# Altium PCB VESC.PcbDoc (part 2 of 3)
Units mm, origin at the board's own origin, x right, y up, seen from the top; angles counter-clockwise.
Board outline 74.1 x 118 mm, 2 copper layers (Component Side, Bottom Layer), stack 1.571 mm thick; 186 components, 177 nets, 891 pads, 378 vias.
Unrouted connection lines stored in the file: 5.
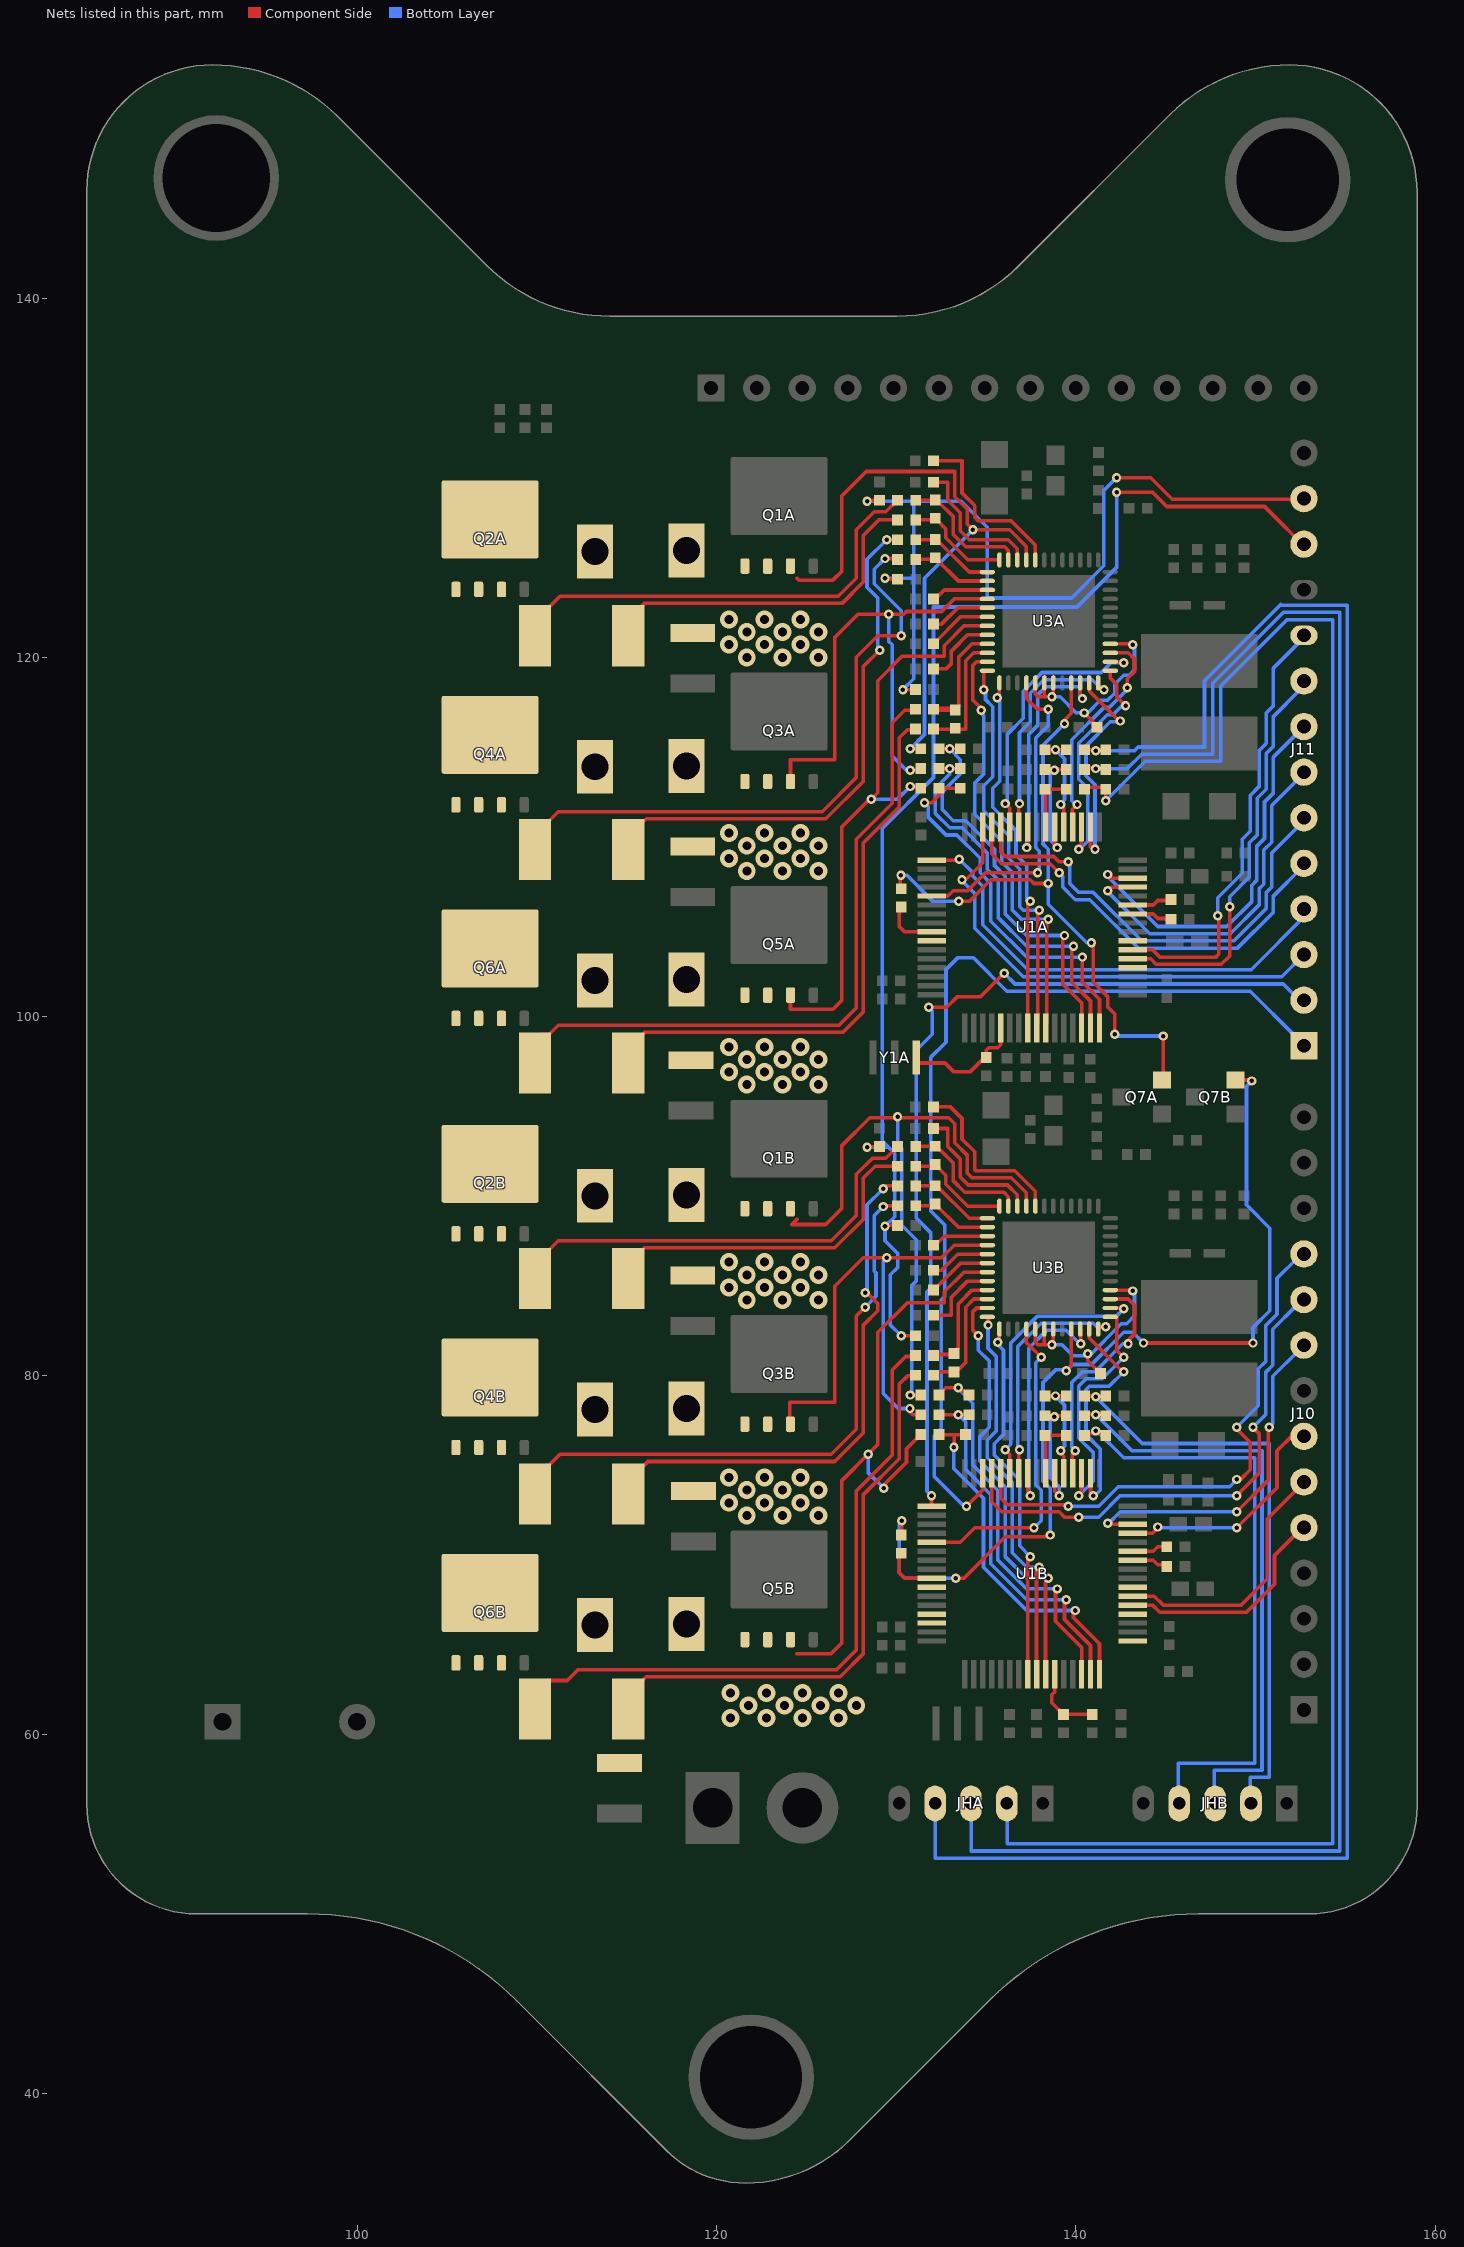
[diagram p2: the nets of this part, all layers, seen from the top]

## Via types
v1: diameter 0.52, hole 0.254, Component Side to Bottom Layer, tented both sides, 205 vias
v2: diameter 1, hole 0.5, Component Side to Bottom Layer, tented both sides, 170 vias
v3: diameter 0.9, hole 0.5, Component Side to Bottom Layer, tented both sides, 3 vias

## Nets (pads, with @x,y where several pads share a name; then routed paths per layer and width w, separated by ;. In a path a pad name is that pad's centre, name@x,y a point inside that pad or via, vN(x,y) a via of type N, cw(c..) or ccw(c..) an arc to the next point about the centre after c; other vN are vias at no path point) (continued)
MA_CURRENT_A: U1A.8 U3A.25 | length 20.3
  Component Side w0.2: v1(135.61,117.75) 135.735,117.875 U3A.25@135.735,118.575 ; U1A.8@137.302,99.55 137.302,106.242 v1(137.46,106.4)
  Bottom Layer w0.2: v1(135.61,117.75) 135.76,117.6 135.76,113.1 135.36,112.7 135.36,111.65 136.66,110.35 136.66,109 137.26,108.4 137.26,106.5 137.36,106.4 v1(137.46,106.4)
MA_CURRENT_B: U1A.9 U3A.24 | length 22.3
  Component Side w0.2: v1(134.86,118.2) 134.86,119.15 134.76,119.25 U3A.24@135.06,119.25 ; U1A.9@137.802,99.55 137.86,99.608 137.86,105.8 v1(137.96,105.9)
  Bottom Layer w0.2: v1(134.86,118.2) 134.96,118.1 134.96,117.65 135.36,117.25 135.36,113.35 134.86,112.85 134.86,111.45 136.26,110.05 136.26,108.8 136.86,108.2 136.86,106.1 137.06,105.9 v1(137.96,105.9)
MA_CURRENT_C: U1A.10 U3A.23 | length 23.9
  Component Side w0.2: v1(134.718,117.05) 134.718,117.15 134.26,117.608 134.26,119.55 134.46,119.75 U3A.23@135.06,119.75 ; U1A.10@138.302,99.55 138.36,99.608 138.36,105.3 v1(138.46,105.4)
  Bottom Layer w0.2: v1(134.718,117.05) 134.718,116.892 134.86,116.75 134.86,113.5 134.36,113 134.36,111.25 135.86,109.75 135.86,108.6 136.46,108 136.46,105.9 136.96,105.4 v1@138.36,105.4
MA_DVDD: C23A.2 U3A.29 U3A.30 U3A.31 U3A.40 | length 13.6
  Component Side w0.2: U3A.29@137.735,118.575 137.735,117.95 137.885,117.8 138.235,117.8 ; U3A.30@138.235,118.575 138.235,117.8 ; U3A.31@138.735,118.575 138.735,117.725 v1(138.66,117.8) 138.235,117.8 ; v1(140.46,116.9) 140.96,116.4 140.96,116.208 C23A.2@141.168,116 ; U3A.40@141.91,120.75 v1@143.235,120.75
  Bottom Layer w0.2: v1(138.66,117.8) 139.118,117.8 140.018,116.9 v1(140.46,116.9) 140.66,116.9 141.36,117.6 141.76,117.6 142.16,118 142.16,118.5 142.66,119 142.96,119 143.26,119.3 143.26,120.6 v1(143.16,120.7)
MA_EN_GATE: R39A.2 U1A.57 | length 3.1
  Component Side w0.2: R39A.2@130.16,106.192 130.16,105 130.46,104.7 U1A.57@131.96,104.7
MA_EN_GATE_R: Q7A.2 R39A.1 U3A.33 | length 38.1
  Component Side w0.2: R39A.1@130.21,107.318 v1@130.21,108.01 ; v1(133.46,106.4) 134.06,106.4 135.26,107.6 137.46,107.6 137.66,107.4 v1(138.46,107.4) ; v1(139.36,116.3) 139.36,116.5 139.735,116.875 U3A.33@139.735,118.575 ; v1(140.86,104.1) 140.96,104 140.96,101.9 141.76,101.1 141.76,100.54 142.15,100.15 v1(142.15,99) ; v1(144.86,98.9) 144.86,96.575 Q7A.2@145.085,96.35
  Bottom Layer w0.2: v1(130.25,107.85) 130.587,107.85 132.037,106.4 v1(133.46,106.4) ; v1(139.36,116.3) 138.16,115.1 138.16,109.6 138.46,109.3 v1(138.46,107.4) 138.46,106.24 140.6,104.1 v1(140.86,104.1) ; v1(142.15,99) 142.15,98.9 143.16,98.9 ; 143.66,98.9 143.16,98.9 ; v1(144.86,98.9) 143.16,98.9
MA_ESTOP: J11.13 R7A.1 R8A.1 R9A.1 | length 48.4
  Component Side w0.2: v1@128.46,128.7 128.502,128.742 R7A.1@129.052,128.742 ; v1(129.36,124.4) 129.41,124.35 R8A.1@130.052,124.35 ; v1(130.36,118.2) R9A.1@131.052,118.2 ; v1(142.26,130) 144.16,130 145.36,128.8 J11.13@152.105,128.8
  Bottom Layer w0.2: v1(128.36,128.7) 130.96,128.7 ; v1(129.36,124.4) 130.96,124.4 ; v1(130.36,118.2) 130.96,118.8 130.96,124.4 ; v1(142.26,130) 141.553,129.293 141.553,125.093 139.76,123.3 135.06,123.3 135.06,127.24 133.6,128.7 130.96,128.7 ; 130.96,124.4 130.96,128.7
MA_H1: U1A.41 U3A.34 | length 14.2
  Component Side w0.2: v1(137.26,109.4) 137.294,109.4 137.302,109.392 137.302,110.542 U1A.41@137.31,110.55 ; U3A.34@140.235,118.575 140.235,117.625 140.26,117.6 v1(140.36,117.7)
  Bottom Layer w0.2: v1(137.26,109.4) 137.26,111.2 137.36,111.3 137.36,115.7 137.86,116.2 137.86,117.9 138.31,118.35 140.21,118.35 v1@140.21,117.75
MA_H2: U1A.42 U3A.36 | length 13.1
  Component Side w0.2: v1@136.744,111.95 136.844,111.85 v1(136.852,111.85) ; U1A.42@136.802,110.75 v1@136.802,111.892 ; U3A.36@141.235,118.575 141.235,118.425 141.46,118.2 v1(141.56,118.2)
  Bottom Layer w0.2: v1@136.76,111.95 136.76,111.85 v1(136.852,111.85) 136.852,115.792 137.46,116.4 137.46,118 138.21,118.75 140.91,118.75 141.46,118.2 v1(141.56,118.2)
MA_H3: U1A.43 U3A.38 | length 15.2
  Component Side w0.2: v1(136.052,111.85) 136.052,111.858 136.302,111.608 U1A.43@136.302,110.75 ; U3A.38@141.91,119.75 142.735,119.75 142.76,119.725 142.66,119.625 v1(142.66,119.7)
  Bottom Layer w0.2: v1(136.052,111.85) 136.16,111.958 136.16,115.7 137.06,116.6 137.06,118.1 138.11,119.15 141.4,119.15 141.95,119.7 v1(142.66,119.7)
MA_HALL1_IN: JHA.2 R15A.1 R18A.1 | length 116.5
  Component Side w0.2: R18A.1@140.468,114.85 R15A.1@141.552,114.85
  Bottom Layer w0.2: 132.16,56.2 132.16,53.1 155.1,53.1 155.1,122.9 151.4,122.9 151.4,122.94 147.16,118.7 147.16,115 143.46,115 143.26,114.8 141.093,114.8 v1(141.1,114.8)
MA_HALL2_IN: JHA.3 R14A.1 R17A.1 | length 112.8
  Component Side w0.2: R17A.1@140.368,113.85 R14A.1@141.452,113.85
  Bottom Layer w0.2: JHA.3@134.16,56.2 134.16,53.5 154.7,53.5 154.7,122.5 151.56,122.5 147.61,118.55 147.61,114.6 143.66,114.6 142.86,113.8 v1(141.1,113.8)
MA_HALL3_IN: JHA.4 R13A.1 R16A.1 | length 109.6
  Component Side w0.2: R16A.1@140.368,112.75 R13A.1@141.452,112.75 ; v1@141.652,112.008 R13A.1@141.652,112.65
  Bottom Layer w0.2: 136.16,56.2 136.16,53.9 154.3,53.9 154.3,122.1 151.76,122.1 148.06,118.4 148.06,114.2 143.86,114.2 v1(141.66,112)
MA_HALL_1: C14A.2 R18A.2 U1A.37 | length 5.9
  Component Side w0.2: C14A.2@138.268,114.85 v1(138.86,114.85) R18A.2@139.452,114.85 ; v1(139.16,111.8) 139.31,111.65 U1A.37@139.31,110.55
  Bottom Layer w0.2: v1(138.86,114.85) 139.36,114.35 139.36,112.058 139.102,111.8 v1(139.16,111.8)
MA_HALL_2: C13A.2 R17A.2 U1A.38 | length 7.3
  Component Side w0.2: C13A.2@138.268,113.75 R17A.2@139.452,113.75 ; U1A.38@138.802,110.75 138.802,109.558 v1(138.96,109.4)
  Bottom Layer w0.2: v1@138.868,113.85 138.8,113.782 v1(138.8,113.7) 138.8,113.682 138.56,113.442 138.56,109.8 v1(138.96,109.4)
MA_HALL_3: C12A.2 R16A.2 U1A.39 | length 3.3
  Component Side w0.2: C12A.2@138.268,112.65 C12A.2@138.31,112.65 ; U1A.39@138.31,110.55 C12A.2@138.31,112.65 ; R16A.2@139.452,112.65 C12A.2@138.31,112.65
MA_L1: U1A.34 U3A.35 | length 12.4
  Component Side w0.2: U3A.35@140.735,118.575 140.735,118.125 142.41,116.45 v1(142.46,116.45) ; U1A.34@140.86,110.2 140.81,110.15 140.81,109.45 140.96,109.3 v1(141.06,109.3)
  Bottom Layer w0.2: v1(141.06,109.3) 141.06,112.9 140.56,113.4 140.56,115.06 141.9,116.4 142.41,116.4 v1(142.46,116.45)
MA_L2: U1A.35 U3A.37 | length 13.8
  Component Side w0.2: v1(140.16,109.3) 140.21,109.3 140.26,109.25 140.31,109.3 140.302,109.308 U1A.35@140.302,110.75 ; U3A.37@141.91,119.25 141.91,118.85 142.26,118.5 142.26,117.8 v1(142.76,117.3)
  Bottom Layer w0.2: v1(140.16,109.3) 140.21,109.3 140.66,109.75 140.66,112.7 140.16,113.2 140.16,115.21 141.75,116.8 142.06,116.8 142.66,117.4 v1(142.76,117.3)
MA_L3: U1A.36 U3A.39 | length 12.9
  Component Side w0.2: U1A.36@139.802,110.45 139.802,111.542 v1(140.06,111.8) ; U3A.39@141.91,120.25 142.91,120.25 143.26,119.9 143.26,119.2 142.86,118.8 v1(142.86,118.3)
  Bottom Layer w0.2: v1(140.06,111.8) 139.96,111.8 139.76,112 139.76,115.4 141.56,117.2 141.86,117.2 142.86,118.2 v1(142.86,118.3)
MA_LED_GREEN: R32A.2 U1A.26 | length 2
  Component Side w0.2: U1A.26@143.16,105.7 144.31,105.7 144.56,105.45 144.952,105.45 R32A.2@145.052,105.35
MA_LED_RED: R31A.2 U1A.27 | length 2
  Component Side w0.2: U1A.27@143.16,106.2 144.31,106.2 144.56,106.45 R31A.2@145.052,106.45
MA_MISO_ADC_EXT2: J11.10 U1A.22 | length 24.7
  Component Side w0.2: U1A.22@143.16,103.7 144.26,103.7 144.66,103.3 147.8,103.3 147.96,103.46 147.96,105.54 v1(147.9,105.6)
  Bottom Layer w0.2: v1(147.9,105.6) 147.9,106.6 149.26,107.96 149.26,109.86 149.7,110.3 149.7,112.3 150.2,112.8 150.2,114.8 150.6,115.2 150.6,116.9 151,117.3 151,119.4 152.4,120.8 J11.10@152.8,120.8
MA_MOSI: U1A.23
MA_NFAULT: U1A.53 U3A.28 | length 18.3
  Component Side w0.2: U1A.53@131.96,106.7 132.86,106.7 133.16,107 133.96,107 134.96,108 v1(137.86,108) ; U3A.28@137.235,118.575 137.235,117.725 137.86,117.1 v1(138.46,117.1)
  Bottom Layer w0.2: v1(137.86,108) 137.96,108 137.96,109.2 137.76,109.4 137.76,115.5 138.46,116.2 v1(138.46,117.1)
MA_PA_AGND: C35A.1 R10A.1 R26A.2 | length 18.9
  Component Side w0.2: R10A.1@115.36,122.1 115.36,122.4 115.96,123 126.96,123 128.16,124.2 128.16,126.8 129.01,127.65 R26A.2@129.802,127.65 ; 129.552,127.65 R26A.2@129.802,127.65 ; R26A.2@130.052,127.65 R26A.2@129.802,127.65
  other v2: 121.66,120 123.66,120 125.66,120 120.66,120.7 122.66,120.7 124.66,120.7 121.66,121.4 123.66,121.4 125.66,121.4 120.66,122.1 122.66,122.1 124.66,122.1
MA_PA_AGND_F: C15A.1 R26A.1 U3A.12 | length 6
  Component Side w0.2: R26A.1@131.168,127.75 R26A.1@131.068,127.65 C15A.1@132.052,127.65 ; C15A.1@132.16,127.742 132.752,127.15 132.752,126.65 133.977,125.425 U3A.12@135.735,125.425
MA_PA_HI: R1A.1 U3A.8 | length 9.9
  Component Side w0.2: R1A.1@132.06,130.95 133.652,130.95 133.652,129.15 134.352,128.45 134.352,127.8 134.544,127.608 136.377,127.608 137.735,126.25 U3A.8@137.735,125.425
MA_PA_LO: R2A.1 U3A.10 | length 8
  Component Side w0.2: R2A.1@132.06,129.75 132.852,129.75 132.852,128.75 133.552,128.05 133.552,127.05 134.052,126.55 136.235,126.55 136.735,126.05 U3A.10@136.735,125.425
MA_PA_SOURCE: Q2A.1 Q2A.2 Q2A.3 R10A.2 R25A.2 | length 25.9
  Component Side w0.2: R10A.2@109.86,121.1 109.86,122.7 110.56,122.7 111.26,123.4 126.76,123.4 127.76,124.4 127.76,127.1 128.76,128.1 129.402,128.1 R25A.2@130.052,128.75
MA_PA_SOURCE_F: C15A.2 R25A.1 U3A.11 | length 8.6
  Component Side w0.2: U3A.11@136.235,125.425 136.235,125.95 136.035,126.15 133.852,126.15 133.152,126.85 133.152,127.85 C15A.2@132.252,128.75 ; C15A.2@132.252,128.75 R25A.1@131.068,128.75 C15A.2@132.252,128.75
MA_PB_AGND: C36A.1 R11A.1 R28A.2 | length 28.6
  Component Side w0.2: R11A.1@115.76,110.7 116.06,111 126.06,111 128.16,113.1 128.16,119.5 v1(129.06,120.4) ; v1(129.452,126.55) R28A.2@130.052,126.55
  Bottom Layer w0.2: v1(129.06,120.4) 128.96,120.5 128.96,123.3 128.36,123.9 128.36,125.458 v1(129.452,126.55)
  other v2: 121.66,108.1 123.66,108.1 125.66,108.1 120.66,108.8 122.66,108.8 124.66,108.8 121.66,109.5 123.66,109.5 125.66,109.5 120.66,110.2 122.66,110.2 124.66,110.2
MA_PB_AGND_F: C16A.1 R28A.1 U3A.13 | length 4.7
  Component Side w0.2: R28A.1@131.068,126.55 132.252,126.55 134.052,124.75 U3A.13@135.06,124.75
MA_PB_HI: R3A.1 U3A.17 | length 3.4
  Component Side w0.2: R3A.1@132.068,121.85 132.51,121.85 133.41,122.75 U3A.17@135.06,122.75
MA_PB_LO: R4A.1 U3A.15 | length 3.4
  Component Side w0.2: R4A.1@132.168,123.25 132.668,123.75 U3A.15@135.41,123.75
MA_PB_SOURCE: Q4A.1 Q4A.2 Q4A.3 R11A.2 R27A.2 | length 36
  Component Side w0.2: R11A.2@109.86,109.3 109.86,110.7 110.06,110.9 110.66,110.9 111.16,111.4 125.86,111.4 127.76,113.3 127.76,120 127.96,120.2 128.96,121.2 v1(130.26,121.2) ; v1(129.36,125.5) 130.052,125.5 R27A.2@130.052,125.45
  Bottom Layer w0.2: v1(129.36,125.5) 128.76,124.9 128.76,124.1 130.26,122.6 v1(130.26,121.2)
MA_PB_SOURCE_F: C16A.2 R27A.1 U3A.14 | length 4.4
  Component Side w0.2: R27A.1@131.16,125.45 132.252,125.45 133.452,124.25 U3A.14@135.06,124.25
MA_PC_AGND: C37A.1 R12A.1 R30A.2 | length 30.1
  Component Side w0.2: R12A.1@115.76,98.9 115.96,99.1 127,99.1 128.16,100.26 128.16,109.66 130.16,111.66 130.16,115.516 130.61,115.966 R30A.2@131.052,115.966
  other v2: 121.66,96.2 123.66,96.2 125.66,96.2 120.66,96.9 122.66,96.9 124.66,96.9 121.66,97.6 123.66,97.6 125.66,97.6 120.66,98.3 122.66,98.3 124.66,98.3
MA_PC_AGND_F: C17A.1 R30A.1 U3A.22 | length 7
  Component Side w0.2: R30A.1@132.068,116 133.86,116 133.86,118.15 133.86,119.8 134.31,120.25 U3A.22@135.06,120.25
MA_PC_HI: R5A.1 U3A.18 | length 3.6
  Component Side w0.2: R5A.1@132.068,120.75 133.568,122.25 U3A.18@135.06,122.25
MA_PC_LO: R6A.1 U3A.20 | length 4.2
  Component Side w0.2: R6A.1@132.068,119.35 132.76,119.35 133.06,119.65 133.06,120.35 133.96,121.25 U3A.20@135.06,121.25
MA_PC_SOURCE: Q6A.1 Q6A.2 Q6A.3 R12A.2 R29A.2 | length 38.2
  Component Side w0.2: R12A.2@109.86,97.4 109.86,98.7 110.16,99 110.66,99 111.16,99.5 126.8,99.5 127.76,100.46 127.76,109.86 129.76,111.86 129.76,116.358 130.452,117.05 R29A.2@131.06,117.05
MA_PC_SOURCE_F: C17A.2 R29A.1 U3A.21 | length 7
  Component Side w0.2: R29A.1@132.168,117.05 C17A.2@133.268,117.05 ; R29A.1@132.26,117.158 133.368,117.158 133.46,117.25 133.46,120 134.21,120.75 U3A.21@135.06,120.75
MA_PHASE_A: JAA.1 Q1A.1 Q1A.2 Q1A.3 Q2A.5 Q2A.6 Q2A.7 Q2A.8 Q2A.9@107.36,127.68 R23A.2 U3A.9 | length 36
  Component Side w0.2: 124.46,124.4 124.56,124.3 126.46,124.3 126.96,124.8 126.96,129 128.31,130.35 133.252,130.35 133.252,128.95 133.952,128.25 133.952,127.408 v1(134.26,127.1) 136.302,127.1 137.235,126.167 U3A.9@137.235,125.425 ; v1@130.602,114.9 v1(130.76,114.9) R23A.2@131.352,114.9
  Bottom Layer w0.2: v1(130.76,114.9) 131.56,115.7 131.56,124.4 v1(134.26,127.1)
MA_PHASE_B: JBA.1 Q3A.1 Q3A.2 Q3A.3 Q4A.5 Q4A.6 Q4A.7 Q4A.8 Q4A.9@107.36,115.68 R21A.2 U3A.16 | length 30.4
  Component Side w0.2: Q3A.3@124.095,112.88 124.095,114.3 126.56,114.3 126.56,121.1 127.86,122.4 v1(129.56,122.4) 130.41,122.4 130.56,122.55 132.51,122.55 133.21,123.25 U3A.16@135.41,123.25 ; v1(130.76,113.7) 131.252,113.7 R21A.2@131.352,113.8
  Bottom Layer w0.2: v1(129.56,122.4) 129.56,120.9 129.76,120.7 129.76,114.5 130.56,113.7 v1(130.76,113.7)
MA_PHASE_C: JCA.1 Q5A.1 Q5A.2 Q5A.3 Q6A.5 Q6A.6 Q6A.7 Q6A.8 Q6A.9@107.36,103.78 R19A.2 U3A.19 | length 33.4
  Component Side w0.2: Q5A.3@124.095,101.18 124.095,100.4 126.46,100.4 126.96,100.9 126.96,110.56 128.55,112.15 v1(128.6,112.1) 128.96,112.46 128.96,118.7 130.31,120.05 132.66,120.05 132.66,120.65 133.76,121.75 U3A.19@135.06,121.75 ; v1(130.76,112.8) 131.252,112.8 R19A.2@131.352,112.7
  Bottom Layer w0.2: v1(128.6,112.1) 130.06,112.1 v1(130.76,112.8)
MA_RX: J11.8 U1A.30 | length 22.5
  Component Side w0.2: v1@141.76,108 141.76,107.8 141.86,107.7 U1A.30@143.16,107.7
  Bottom Layer w0.2: v1(141.76,107.9) 141.76,107.8 144.56,105 148.4,105 149.8,106.4 149.8,107.3 150.06,107.56 150.06,109.46 150.5,109.9 150.5,111.94 151,112.44 151,114.44 J11.8@152.7,116.14
MA_RX_SDA_NSS: U1A.20
MA_SCK_ADC_EXT: J11.9 U1A.21 | length 22.4
  Component Side w0.2: U1A.21@143.16,103.2 144.16,103.2 144.46,102.9 148.1,102.9 148.56,103.36 v1@148.56,106
  Bottom Layer w0.2: v1(148.56,106.1) 148.56,106.66 149.66,107.76 149.66,109.66 150.1,110.1 150.1,112.14 150.6,112.64 150.6,114.64 151,115.04 151,116.7 152.5,118.2 J11.9@152.5,118.5
MA_SERVO: U1A.58
MA_SWDCLK: J11.4 U1A.49 | length 26.7
  Component Side w0.2: U1A.49@131.96,108.7 133.45,108.7 v1(133.5,108.75)
  Bottom Layer w0.2: v1(133.5,108.75) 134.26,107.99 134.26,107.8 134.81,107.25 134.81,105.1 137.31,102.6 149.76,102.6 152.9,105.74 J11.4@152.9,106.3
MA_SWDIO: J11.3 U1A.46 | length 26.4
  Component Side w0.2: v1(133.65,107.6) 133.86,107.6 134.81,108.55 U1A.46@134.81,110.55
  Bottom Layer w0.2: v1@133.73,107.47 134.36,106.84 134.36,104.9 137.06,102.2 151.46,102.2 J11.3@152.7,103.44
MA_TX: J11.7 U1A.29 | length 20
  Component Side w0.2: v1(141.76,107) 141.96,107.2 U1A.29@143.16,107.2
  Bottom Layer w0.2: v1(141.76,107) 141.76,106.95 144.11,104.6 148.6,104.6 150.2,106.2 150.2,107.1 150.46,107.36 150.46,109.26 150.9,109.7 150.9,111.74 J11.7@152.73,113.57
MA_USB_DM: J11.6 U1A.44 | length 25.6
  Component Side w0.2: U1A.44@135.81,110.55 135.81,109.15 136.06,108.9 138.76,108.9 139.06,108.6 v1(139.56,108.6)
  Bottom Layer w0.2: v1(139.56,108.6) 139.66,108.5 139.66,107.4 140.16,106.9 140.96,106.9 143.66,104.2 148.8,104.2 150.6,106 150.6,106.9 150.9,107.2 150.9,109.1 152.7,110.9 J11.6@152.7,111.06
MA_USB_DP: J11.5 U1A.45 | length 23.9
  Component Side w0.2: U1A.45@135.31,110.55 135.31,109.05 135.86,108.5 138.56,108.5 v1(139.06,108)
  Bottom Layer w0.2: v1(139.06,108) 139.26,107.8 139.26,107.2 139.96,106.5 140.76,106.5 143.46,103.8 149,103.8 151,105.8 151,106.7 152.6,108.3 J11.5@152.8,108.3
MA_VOLTAGE_A: R23A.1 R24A.2 U1A.14 | length 22.3
  Component Side w0.2: R23A.1@132.318,114.866 132.352,114.9 v1(132.96,114.9) 133.518,114.9 133.552,114.866 R24A.2@133.552,114.9 ; v1(139.36,104.5) 139.26,104.4 139.26,101.8 140.31,100.75 U1A.14@140.31,99.45
  Bottom Layer w0.2: v1(132.96,114.9) 133.56,114.3 133.56,113.5 132.56,112.5 132.56,111.5 133.16,110.9 133.86,110.9 135.46,109.3 135.46,108.4 136.06,107.8 136.06,105.7 137.26,104.5 v1(139.36,104.5)
MA_VOLTAGE_B: R21A.1 R22A.2 U1A.15 | length 21.6
  Component Side w0.2: R21A.1@132.318,113.766 132.352,113.8 R21A.1@132.368,113.8 v1(132.96,113.8) 133.518,113.8 133.552,113.766 R22A.2@133.552,113.8 ; v1(139.86,103.9) 139.76,103.8 139.76,101.9 140.81,100.85 U1A.15@140.81,99.45
  Bottom Layer w0.2: v1(132.96,113.8) 132.96,113.5 132.16,112.7 132.16,111.3 132.96,110.5 133.66,110.5 135.06,109.1 135.06,108.2 135.66,107.6 135.66,105.5 137.26,103.9 v1(139.86,103.9)
MA_VOLTAGE_C: R19A.1 R20A.2 U1A.16 | length 21.3
  Component Side w0.2: v1(131.56,111.9) 131.96,111.9 132.368,112.308 R19A.1@132.368,112.7 133.518,112.7 133.552,112.666 R20A.2@133.552,112.7 ; R19A.1@132.318,112.666 132.352,112.7 R19A.1@132.36,112.692 ; v1(140.36,103.3) 140.36,101.9 141.31,100.95 U1A.16@141.31,99.45
  Bottom Layer w0.2: v1(131.56,111.9) 131.76,111.7 131.76,111.1 132.76,110.1 133.36,110.1 134.66,108.8 134.66,108 135.26,107.4 135.26,105.3 137.26,103.3 v1(140.36,103.3)
MB_ADC_TEMP: U1B.17
MB_AN_IN: R38B.1 R40B.2 U1B.11 | length 4.2
  Component Side w0.2: U1B.11@138.81,63.35 138.81,62.36 138.65,62.2 138.65,61.758 R40B.2@139.3,61.108 R38B.1@140.9,61.108
MB_CAN_RX: U1B.61
MB_CAN_TX: U1B.62
MB_CURRENT_A: U1B.8 U3B.25 | length 20.6
  Component Side w0.2: v1(135.65,81.85) 135.65,81.84 135.71,81.9 135.735,81.875 U3B.25@135.735,82.575 ; U1B.8@137.31,63.35 137.31,69.75 v1(137.46,69.9)
  Bottom Layer w0.2: v1(135.65,81.85) 135.65,81.81 135.6,81.76 135.96,81.4 135.96,76.7 135.45,76.19 135.45,75.56 136.86,74.15 136.86,70.5 v1(137.46,69.9)
MB_CURRENT_B: U1B.9 U3B.24 | length 21.8
  Component Side w0.2: v1(135.1,82.8) 135.1,83.2 U3B.24@135.26,83.2 ; U1B.9@137.802,63.55 137.802,69.142 v1(137.96,69.3)
  Bottom Layer w0.2: v1(135.1,82.8) 135.1,81.51 135.56,81.05 135.56,76.9 135.05,76.39 135.05,75.41 136.46,74 136.45,74 136.45,70.11 137.26,69.3 v1@137.86,69.3
MB_CURRENT_C: U1B.10 U3B.23 | length 23.9
  Component Side w0.2: v1(134.56,82.2) 134.26,82.5 134.26,83.55 134.46,83.75 U3B.23@135.06,83.75 ; U1B.10@138.302,63.55 138.302,68.442 138.385,68.525 138.385,68.775 v1(138.46,68.7)
  Bottom Layer w0.2: v1(134.56,82.2) 134.56,81.4 135.16,80.8 135.16,77.1 134.65,76.59 134.65,75.21 136.06,73.8 136.05,73.8 136.05,69.91 137.26,68.7 v1@138.36,68.7
MB_DVDD: C23B.2 U3B.29 U3B.30 U3B.31 U3B.40 | length 13.4
  Component Side w0.2: U3B.29@137.735,82.575 137.735,81.85 137.873,81.712 138.235,81.712 ; U3B.30@138.235,82.575 138.235,81.712 ; v1@138.548,81.6 138.648,81.7 v1(138.66,81.7) ; v1@138.548,81.712 138.235,81.712 ; v1@138.735,81.787 U3B.31@138.735,82.575 ; v1(140.66,81.2) 140.66,80.808 C23B.2@141.368,80.1 ; U3B.40@141.91,84.75 v1@143.235,84.75
  Bottom Layer w0.2: v1(138.66,81.7) 139.218,81.7 139.818,81.1 140.56,81.1 v1(140.66,81.2) 140.76,81.1 142.53,82.87 142.82,82.87 143.26,83.31 143.26,83.6 143.26,84.6 v1(143.16,84.7)
MB_EN_GATE: R39B.2 U1B.57 | length 3.1
  Component Side w0.2: R39B.2@130.26,70.092 130.16,69.992 130.16,69 130.46,68.7 U1B.57@131.96,68.7
MB_EN_GATE_R: Q7B.2 R39B.1 U3B.33 | length 54
  Component Side w0.2: v1(130.3,71.9) 130.3,71.268 R39B.1@130.36,71.208 ; v1(133.3,68.7) 133.76,68.7 136.06,71 138.46,71 v1(138.56,71.1) ; v1(139.46,80.25) 139.735,80.525 U3B.33@139.735,82.575 ; v1(143.76,81.8) v1(149.86,81.8) ; Q7B.2@148.885,96.45 v1@149.75,96.45
  Bottom Layer w0.2: v1(130.3,71.9) 130.16,71.76 130.16,69 130.46,68.7 v1(133.3,68.7) ; v1(138.56,71.1) 138.56,73.7 138.16,74.1 138.16,79.6 138.86,80.3 v1@139.51,80.3 ; v1(139.46,80.25) v1@139.51,80.3 ; v1(143.76,81.8) 143.16,82.4 142.66,82.4 140.86,80.6 139.81,80.6 v1@139.51,80.3 ; v1(149.8,96.4) 149.5,96.1 149.5,89.5 150.8,88.2 150.8,83.6 149.86,82.66 v1(149.86,81.8)
MB_ESTOP: J11.12 R7B.1 R8B.1 R9B.1 | length 73.6
  Component Side w0.2: v1@128.502,92.742 R7B.1@129.052,92.742 ; v1@129.41,88.35 R8B.1@130.052,88.35 ; v1(130.26,82.2) R9B.1@131.052,82.2 ; v1(142.26,129.2) 144.26,129.2 145.06,128.4 150.5,128.4 J11.12@153.025,125.875
  Bottom Layer w0.2: v1(128.36,92.7) 129.56,92.7 ; v1(130.26,82.2) 129.66,82.8 129.66,85.6 130.06,86 130.06,86.8 129.36,87.5 v1(129.36,88.3) 129.9,88.84 129.9,92.36 129.2,93.06 129.2,110.44 132.06,113.3 132.06,122.8 140.06,122.8 142.26,125 v1(142.26,129.2)
MB_H1: U1B.41 U3B.34 | length 14.1
  Component Side w0.2: U1B.41@137.31,74.55 137.302,74.542 137.302,73.608 137.56,73.35 137.51,73.3 v1(137.46,73.3) ; U3B.34@140.235,82.575 140.26,82.55 v1(140.26,81.75)
  Bottom Layer w0.2: v1(137.46,73.3) 137.36,73.4 137.36,81.5 138.36,82.5 139.46,82.5 v1@140.21,81.75
MB_H2: U1B.42 U3B.36 | length 13.3
  Component Side w0.2: v1@136.744,75.95 136.844,75.85 v1(136.852,75.85) ; U1B.42@136.802,74.75 v1@136.802,75.892 ; U3B.36@141.235,82.575 141.36,82.7 v1(141.66,82.7)
  Bottom Layer w0.2: v1@136.76,75.95 136.852,75.858 v1(136.852,75.85) 136.76,75.85 136.76,81.6 138.06,82.9 140.96,82.9 141.16,82.7 v1(141.66,82.7)
MB_H3: U1B.43 U3B.38 | length 15.2
  Component Side w0.2: v1(136.052,75.85) 136.052,75.858 136.302,75.608 U1B.43@136.302,74.75 ; U3B.38@141.91,83.75 v1@142.735,83.75
  Bottom Layer w0.2: v1(136.052,75.85) 136.36,76.158 136.36,81.8 137.86,83.3 142.26,83.3 v1(142.66,83.7)
MB_HALL1_IN: JHB.2 R15B.1 R18B.1 | length 33.4
  Component Side w0.2: R18B.1@140.468,78.85 R15B.1@141.552,78.85
  Bottom Layer w0.2: v1(141.1,78.8) 141.1,78.793 143.693,76.2 150.76,76.2 150.76,57.6 149.7,57.6 149.7,55.94 JHB.2@149.5,55.74
MB_HALL2_IN: JHB.3 R14B.1 R17B.1 | length 34
  Component Side w0.2: R17B.1@140.368,77.85 R14B.1@141.452,77.85
  Bottom Layer w0.2: v1(141.1,77.8) 141.118,77.8 143.118,75.8 150.36,75.8 150.36,58 147.7,58 147.7,55.94 JHB.3@147.5,55.74
MB_HALL3_IN: JHB.4 R13B.1 R16B.1 | length 34.6
  Component Side w0.2: R16B.1@140.368,76.75 R13B.1@141.452,76.75
  Bottom Layer w0.2: v1(141.1,76.9) 141.1,76.94 141.11,76.95 142.66,75.4 149.96,75.4 149.96,58.4 145.7,58.4 145.7,55.94 JHB.4@145.5,55.74
MB_HALL_1: C14B.2 R18B.2 U1B.37 | length 6.1
  Component Side w0.2: C14B.2@138.268,78.85 v1(138.86,78.85) R18B.2@139.452,78.85 ; v1(139.16,75.8) 139.01,75.8 139.31,75.5 U1B.37@139.31,74.55
  Bottom Layer w0.2: v1(138.86,78.85) 139.36,78.35 139.36,76.042 139.118,75.8 v1(139.16,75.8)
MB_HALL_2: C13B.2 R17B.2 U1B.38 | length 7.8
  Component Side w0.2: C13B.2@138.268,77.75 R17B.2@139.452,77.75 ; U1B.38@138.802,74.55 U1B.38@138.802,74.75 ; U1B.38@138.81,74.55 138.81,73.55 v1(139.06,73.3)
  Bottom Layer w0.2: v1@138.868,77.85 138.8,77.782 v1(138.8,77.7) 138.8,77.682 138.56,77.442 138.56,74.3 139.06,73.8 139.06,73.4 138.96,73.3 v1(139.06,73.3)
MB_HALL_3: C12B.2 R16B.2 U1B.39 | length 3.3
  Component Side w0.2: C12B.2@138.268,76.65 R16B.2@139.452,76.65 ; U1B.39@138.31,74.55 C12B.2@138.31,76.708
MB_L1: U1B.34 U3B.35 | length 13.3
  Component Side w0.2: U3B.35@140.735,82.575 140.735,82.075 v1@142.61,80.2 ; v1@140.81,73.45 U1B.34@140.81,74.55
  Bottom Layer w0.2: v1@140.86,73.4 141.16,73.4 141.36,73.6 141.36,75.9 140.56,76.7 140.56,79.2 140.76,79.4 141.86,79.4 v1(142.66,80.2)
  other v1: 140.96,73.3
MB_L2: U1B.35 U3B.37 | length 14.6
  Component Side w0.2: v1(140.16,73.3) 140.294,73.3 140.302,73.308 U1B.35@140.302,74.75 ; v1(142.66,81) 142.26,81.4 U3B.37@142.26,83.25 ; U3B.37@142.26,83.25 U3B.37@141.91,83.25 U3B.37@142.26,83.25
  Bottom Layer w0.2: v1(140.16,73.3) 140.96,74.1 140.96,75.7 140.16,76.5 140.16,79.4 140.56,79.8 141.46,79.8 v1(142.66,81)
MB_L3: U1B.36 U3B.39 | length 13.1
  Component Side w0.2: U1B.36@139.802,74.45 v1@139.802,75.683 ; U3B.39@141.91,84.25 142.91,84.25 143.26,83.9 143.26,82.3 ; v1(142.9,81.75) 142.9,81.94 143.26,82.3 ; 143.26,82.5 143.26,82.3
  Bottom Layer w0.2: v1(139.96,75.8) 139.76,76 139.76,79.6 140.36,80.2 141.06,80.2 142.61,81.75 v1(142.9,81.75)
MB_LED_GREEN: R32B.2 U1B.26 | length 2
  Component Side w0.2: U1B.26@143.16,69.7 144.31,69.7 144.56,69.45 144.952,69.45 R32B.2@145.052,69.35
MB_LED_RED: R31B.2 U1B.27 | length 2
  Component Side w0.2: U1B.27@143.16,70.2 144.31,70.2 144.56,70.45 R31B.2@145.052,70.45
MB_MISO_ADC_EXT2: J10.6 U1B.22 | length 14
  Component Side w0.2: U1B.22@143.16,67.7 144.36,67.7 144.86,67.2 149.2,67.2 150.66,68.66 150.66,72 J10.6@152.355,73.695
MB_MOSI: U1B.23
MB_NFAULT: U1B.53 U3B.28 | length 18
  Component Side w0.2: U1B.53@131.96,70.7 133.56,70.7 134.06,71.2 134.36,71.5 v1(137.66,71.5) ; U3B.28@137.235,82.575 137.235,81.825 v1(138.06,81)
  Bottom Layer w0.2: v1@137.66,71.4 v1(137.66,71.5) 138.06,71.9 138.06,73.6 137.76,73.9 137.76,80.7 v1(138.06,81)
MB_PA_AGND: C35B.1 R10B.1 R26B.2 | length 17.9
  Component Side w0.2: R10B.1@115.56,86.4 115.56,86.7 115.96,87.1 126.56,87.1 128.16,88.7 128.16,91 128.81,91.65 R26B.2@129.802,91.65
  other v2: 121.66,84.2 123.66,84.2 125.66,84.2 120.66,84.9 122.66,84.9 124.66,84.9 121.66,85.6 123.66,85.6 125.66,85.6 120.66,86.3 122.66,86.3 124.66,86.3
MB_PA_AGND_F: C15B.1 R26B.1 U3B.12 | length 6
  Component Side w0.2: R26B.1@131.168,91.75 R26B.1@131.068,91.65 C15B.1@132.052,91.65 ; C15B.1@132.16,91.742 132.752,91.15 132.752,90.65 133.977,89.425 U3B.12@135.735,89.425
MB_PA_HI: R1B.1 U3B.8 | length 9.7
  Component Side w0.2: R1B.1@132.06,94.95 133.01,94.95 133.652,94.308 133.652,93.15 134.352,92.45 134.352,91.45 134.402,91.4 136.585,91.4 137.735,90.25 U3B.8@137.735,89.425
MB_PA_LO: R2B.1 U3B.10 | length 8
  Component Side w0.2: R2B.1@132.06,93.75 132.852,93.75 132.852,92.75 133.552,92.05 133.552,91.05 134.002,90.6 136.185,90.6 136.735,90.05 U3B.10@136.735,89.425
MB_PA_SOURCE: Q2B.1 Q2B.2 Q2B.3 R10B.2 R25B.2 | length 25.6
  Component Side w0.2: R10B.2@109.86,85.1 109.86,86.6 110.26,87 110.66,87 111.16,87.5 126.36,87.5 127.76,88.9 127.76,91.2 128.66,92.1 129.402,92.1 R25B.2@130.052,92.75
MB_PA_SOURCE_F: C15B.2 R25B.1 U3B.11 | length 7.3
  Component Side w0.2: R25B.1@131.068,92.75 132.152,92.75 C15B.2@132.16,92.758 ; C15B.2@132.252,92.75 133.152,91.85 133.152,90.85 133.802,90.2 135.985,90.2 136.235,89.95 U3B.11@136.235,89.425
MB_PB_AGND: C36B.1 R11B.1 R28B.2 | length 28.9
  Component Side w0.2: R11B.1@115.66,74.7 116.16,75.2 126.56,75.2 128.16,76.8 128.16,82.8 128.96,83.6 128.96,84 128.36,84.6 v1(128.26,84.6) ; v1(129.26,90.4) 129.41,90.55 R28B.2@130.052,90.55
  Bottom Layer w0.2: v1(128.26,84.6) 128.36,84.7 128.36,89.5 v1(129.26,90.4)
  other v2: 121.66,72.2 123.66,72.2 125.66,72.2 120.66,72.9 122.66,72.9 124.66,72.9 121.66,73.6 123.66,73.6 125.66,73.6 120.66,74.3 122.66,74.3 124.66,74.3
MB_PB_AGND_F: C16B.1 R28B.1 U3B.13 | length 4.7
  Component Side w0.2: R28B.1@131.068,90.55 132.252,90.55 134.052,88.75 U3B.13@135.06,88.75
MB_PB_HI: R3B.1 U3B.17 | length 3.4
  Component Side w0.2: R3B.1@132.068,85.85 132.51,85.85 133.41,86.75 U3B.17@135.06,86.75
MB_PB_LO: R4B.1 U3B.15 | length 3.4
  Component Side w0.2: R4B.1@132.168,87.25 132.668,87.75 U3B.15@135.41,87.75
MB_PB_SOURCE: Q4B.1 Q4B.2 Q4B.3 R11B.2 R27B.2 | length 34.3
  Component Side w0.2: R11B.2@109.86,73.3 109.86,74.4 110.46,75 110.66,75 111.26,75.6 126.36,75.6 127.76,77 127.76,83.3 v1(128.26,83.8) ; v1(129.26,89.4) 129.31,89.45 R27B.2@130.052,89.45
  Bottom Layer w0.2: v1(128.26,83.8) 128.86,84.4 128.86,85.7 128.76,85.8 128.76,88.9 v1(129.26,89.4) ; v1(129.26,89.4) 129.402,89.4 v1(129.26,89.4)
MB_PB_SOURCE_F: C16B.2 R27B.1 U3B.14 | length 4.4
  Component Side w0.2: R27B.1@131.16,89.45 132.252,89.45 133.452,88.25 U3B.14@135.06,88.25
MB_PC_AGND: C37B.1 R12B.1 R30B.2 | length 31.8
  Component Side w0.2: R12B.1@115.06,61.4 115.06,62.2 116.06,63.2 126.86,63.2 128.16,64.5 128.16,73.36 130.16,75.36 130.16,79.516 130.61,79.966 R30B.2@131.052,79.966
  other v2: 120.76,60.9 122.76,60.9 124.76,60.9 126.76,60.9 121.76,61.6 123.76,61.6 125.76,61.6 127.76,61.6 120.76,62.3 122.76,62.3 124.76,62.3 126.76,62.3
MB_PC_AGND_F: C17B.1 R30B.1 U3B.22 | length 6.8
  Component Side w0.2: R30B.1@132.068,80 132.268,80.2 133.35,80.2 133.86,80.71 133.86,82.15 133.86,83.8 134.31,84.25 U3B.22@135.06,84.25 ; C17B.1@133.2,80 C17B.1@133.2,80.2
MB_PC_HI: R5B.1 U3B.18 | length 3.6
  Component Side w0.2: R5B.1@132.068,84.75 133.568,86.25 U3B.18@135.06,86.25
MB_PC_LO: R6B.1 U3B.20 | length 4.4
  Component Side w0.2: R6B.1@132.068,83.35 133.06,83.35 133.06,84.35 133.96,85.25 U3B.20@135.06,85.25
MB_PC_SOURCE: Q6B.1 Q6B.2 Q6B.3 R12B.2 R29B.2 | length 35.9
  Component Side w0.2: R12B.2@110.56,63 111.66,63 112.26,63.6 126.66,63.6 127.76,64.7 127.76,73.56 129.76,75.56 129.76,80.3 130.51,81.05 R29B.2@131.06,81.05
MB_PC_SOURCE_F: C17B.2 R29B.1 U3B.21 | length 5.7
  Component Side w0.2: R29B.1@132.26,81.158 133.058,81.158 133.45,81.55 133.45,83.99 134.21,84.75 U3B.21@135.06,84.75
MB_PHASE_A: JAB.1 Q1B.1 Q1B.2 Q1B.3 Q2B.5 Q2B.6 Q2B.7 Q2B.8 Q2B.9@107.36,91.78 R23B.2 U3B.9 | length 38.5
  Component Side w0.2: 124.46,88.7 124.16,88.4 126.06,88.4 126.96,89.3 126.96,92.8 128.51,94.35 132.91,94.35 133.252,94.008 133.252,92.95 133.952,92.25 133.952,91.25 134.202,91 136.402,91 137.235,90.167 U3B.9@137.235,89.425 ; v1@130.602,78.9 v1(130.76,78.9) R23B.2@131.352,78.9
  Bottom Layer w0.2: v1(130.06,94.4) 130.06,92.9 130.3,92.66 130.3,88.36 131.1,87.56 131.1,85.25 130.86,85.01 130.86,79 v1(130.76,78.9)
MB_PHASE_B: JBB.1 Q3B.1 Q3B.2 Q3B.3 Q4B.5 Q4B.6 Q4B.7 Q4B.8 Q4B.9@107.36,79.88 R21B.2 U3B.16 | length 30.7
  Component Side w0.2: Q3B.3@124.06,76.915 124.06,78.5 126.56,78.5 126.56,84.96 128.142,86.542 129.36,86.542 129.368,86.55 132.51,86.55 133.21,87.25 U3B.16@135.41,87.25 ; v1(130.75,78.15) 130.75,77.95 130.9,77.8 R21B.2@131.352,77.8
  Bottom Layer w0.2: v1(129.46,86.55) 129.26,86.35 129.26,78.99 130.1,78.15 v1(130.75,78.15)
MB_PHASE_C: JCB.1 Q5B.1 Q5B.2 Q5B.3 Q6B.5 Q6B.6 Q6B.7 Q6B.8 Q6B.9@107.36,67.88 R19B.2 U3B.19 | length 34.9
  Component Side w0.2: 124.46,64.5 126.36,64.5 126.96,65.1 126.96,74.142 v1(128.418,75.6) 128.96,76.142 ; 128.96,76.2 128.96,76.142 ; v1(129.3,73.7) 129.3,73.9 130.56,75.16 130.56,75.908 R19B.2@131.352,76.7 ; U3B.19@135.06,85.75 133.76,85.75 132.66,84.65 132.66,84.05 130.61,84.05 128.96,82.4 128.96,76.142
  Bottom Layer w0.2: v1(128.418,75.6) 128.418,74.584 v1(129.3,73.7) v1(129.3,73.7)
MB_RX: J10.9 U1B.30 | length 19.7
  Component Side w0.2: v1@141.86,71.7 U1B.30@143.16,71.7 ; v1(148.96,72.4) 150.7,74.14 150.7,77.04 v1(150.76,77.1)
  Bottom Layer w0.2: v1(141.76,71.75) 141.81,71.75 142.46,72.4 v1(148.96,72.4) ; v1(150.76,77.1) 150.96,77.3 150.96,79.94 152.405,81.385 J10.9@152.06,81.73
MB_RX_SDA_NSS: U1B.20
MB_SCK_ADC_EXT: J10.5 U1B.21 | length 12.1
  Component Side w0.2: U1B.21@143.16,67.2 144.26,67.2 144.66,66.8 149.5,66.8 151.06,68.36 151.06,69.96 152.205,71.105 J10.5@152.205,71.305
MB_SERVO: U1B.58
MB_SWDCLK: J11.2 U1B.49 | length 50.9
  Component Side w0.2: v1(131.8,100.5) 132.8,100.5 133.4,101.1 134.7,101.1 v1@135.9,102.3 ; v1(131.95,73.3) 131.95,72.71 U1B.49@131.96,72.7
  Bottom Layer w0.2: v1(131.8,100.5) 132,100.3 132,99 131.1,98.1 131.1,88.76 131.9,87.96 131.9,84.85 131.7,84.65 131.7,73.55 v1(131.95,73.3) ; v1(136,102.4) 136.6,101.8 151.55,101.8 152.45,100.9 J11.2@152.7,100.9
MB_SWDIO: J11.1 U1B.46 | length 56.6
  Component Side w0.2: v1(133.9,72.7) 134.1,72.9 134.81,73.61 U1B.46@134.81,74.55
  Bottom Layer w0.2: v1(133.9,72.7) 133.76,72.7 132.1,74.36 132.1,76.64 132.5,77.04 132.5,84.2 132.7,84.4 132.7,88.36 131.9,89.16 131.9,97.7 132.76,98.56 132.76,102.61 133.4,103.25 134.3,103.25 136.15,101.4 149.7,101.4 152.2,98.9 152.2,98.1 J11.1@152.5,97.8
MB_TX: J10.7 U1B.29 | length 12.4
  Component Side w0.2: U1B.29@143.16,71.2 144.26,71.2 v1@144.56,71.5 ; v1(148.96,71.5) 151.2,73.74 151.2,75.79 J10.7@152.06,76.65
  Bottom Layer w0.2: v1(144.56,71.55) 144.56,71.5 v1(148.96,71.5)
MB_USB_DM: J10.11 U1B.44 | length 30.3
  Component Side w0.2: U1B.44@135.81,74.55 135.81,73.15 136.16,72.8 139.46,72.8 v1(139.56,72.7) ; v1(148.96,74.2) 149.16,74.2 149.7,74.74 149.7,76.26 149.06,76.9 v1@149.06,77.2
  Bottom Layer w0.2: v1(139.56,72.7) 141.26,72.7 142.36,73.8 148.56,73.8 v1(148.96,74.2) ; v1(148.96,77.1) 150.16,78.3 150.16,80.36 150.56,80.76 150.56,82.76 151.2,83.4 151.2,85.4 152.33,86.53 J10.11@152.06,86.8
MB_USB_DP: J10.10 U1B.45 | length 28.7
  Component Side w0.2: U1B.45@135.31,74.55 135.31,72.95 135.86,72.4 139.06,72.4 139.36,72.1 v1(140.16,72.1) ; v1(148.96,73.3) 150.2,74.54 150.2,76.76 v1(149.86,77.1)
  Bottom Layer w0.2: v1(140.16,72.1) 141.26,72.1 142.46,73.3 v1(148.96,73.3) ; v1(149.86,77.1) 150.56,77.8 150.56,80.16 150.96,80.56 150.96,82.56 152.26,83.86 J10.10@152.26,84.27
MB_VOLTAGE_A: R23B.1 R24B.2 U1B.14 | length 21.7
  Component Side w0.2: R23B.1@132.318,78.866 132.752,79.3 v1(133.45,79.3) 133.45,79.35 133.7,79.1 R24B.2@133.8,79.1 ; v1(138.96,68.1) 138.86,68.2 138.86,66.3 140.31,64.85 U1B.14@140.31,63.45
  Bottom Layer w0.2: v1(133.45,79.3) 133.45,79.25 134.25,78.45 134.25,75 135.65,73.6 135.65,69.71 137.26,68.1 v1@138.86,68.1
MB_VOLTAGE_B: R21B.1 R22B.2 U1B.15 | length 20.8
  Component Side w0.2: R21B.1@132.318,77.766 132.352,77.8 R21B.1@132.368,77.8 v1(133.45,77.8) v1@133.518,77.8 ; v1@133.552,77.8 133.552,77.766 v1@133.518,77.8 ; R22B.2@134.042,77.8 v1@133.518,77.8 ; v1(139.46,67.5) 139.36,67.6 139.36,66.4 140.81,64.95 U1B.15@140.81,63.45
  Bottom Layer w0.2: v1(133.45,77.8) 133.85,77.4 133.85,74.75 135.25,73.35 135.25,69.51 137.26,67.5 v1(139.46,67.5)
MB_VOLTAGE_C: R19B.1 R20B.2 U1B.16 | length 19.8
  Component Side w0.2: R19B.1@132.318,76.666 R19B.1@132.352,76.7 ; R19B.1@132.36,76.692 R19B.1@132.352,76.7 ; v1@133.218,76.008 133.218,76.7 ; R20B.2@133.842,76.7 133.218,76.7 ; v1(139.96,66.9) 139.86,66.8 139.86,66.5 141.31,65.05 U1B.16@141.31,63.45 ; R19B.1@132.352,76.7 R19B.1@132.368,76.7 133.218,76.7
  Bottom Layer w0.2: v1(133.2,76) 133.2,74.8 134.85,73.15 134.85,69.31 137.26,66.9 v1(139.96,66.9)
NetC1A_1: C1A.1 U1A.5 Y1A.3 | length 7.2
  Component Side w0.2: Y1A.3@131.1,97.4 132.7,97.4 133.2,96.9 134.1,96.9 134.908,97.708 C1A.1@135.16,97.708 ; C1A.1@135,97.708 135,98.1 135.148,98.248 135.65,98.248 135.81,98.408 U1A.5@135.81,99.35 U1A.5@135.81,99.65